# Altium PCB usb cuter.PcbDoc
Units mm, origin at the board's own origin, x right, y up, seen from the top; angles counter-clockwise.
Board outline 151 x 86.38 mm, 2 copper layers (Top Layer, Bottom Layer); 5 components, 5 nets, 36 pads, 0 vias.
Unrouted connection lines stored in the file: 6.
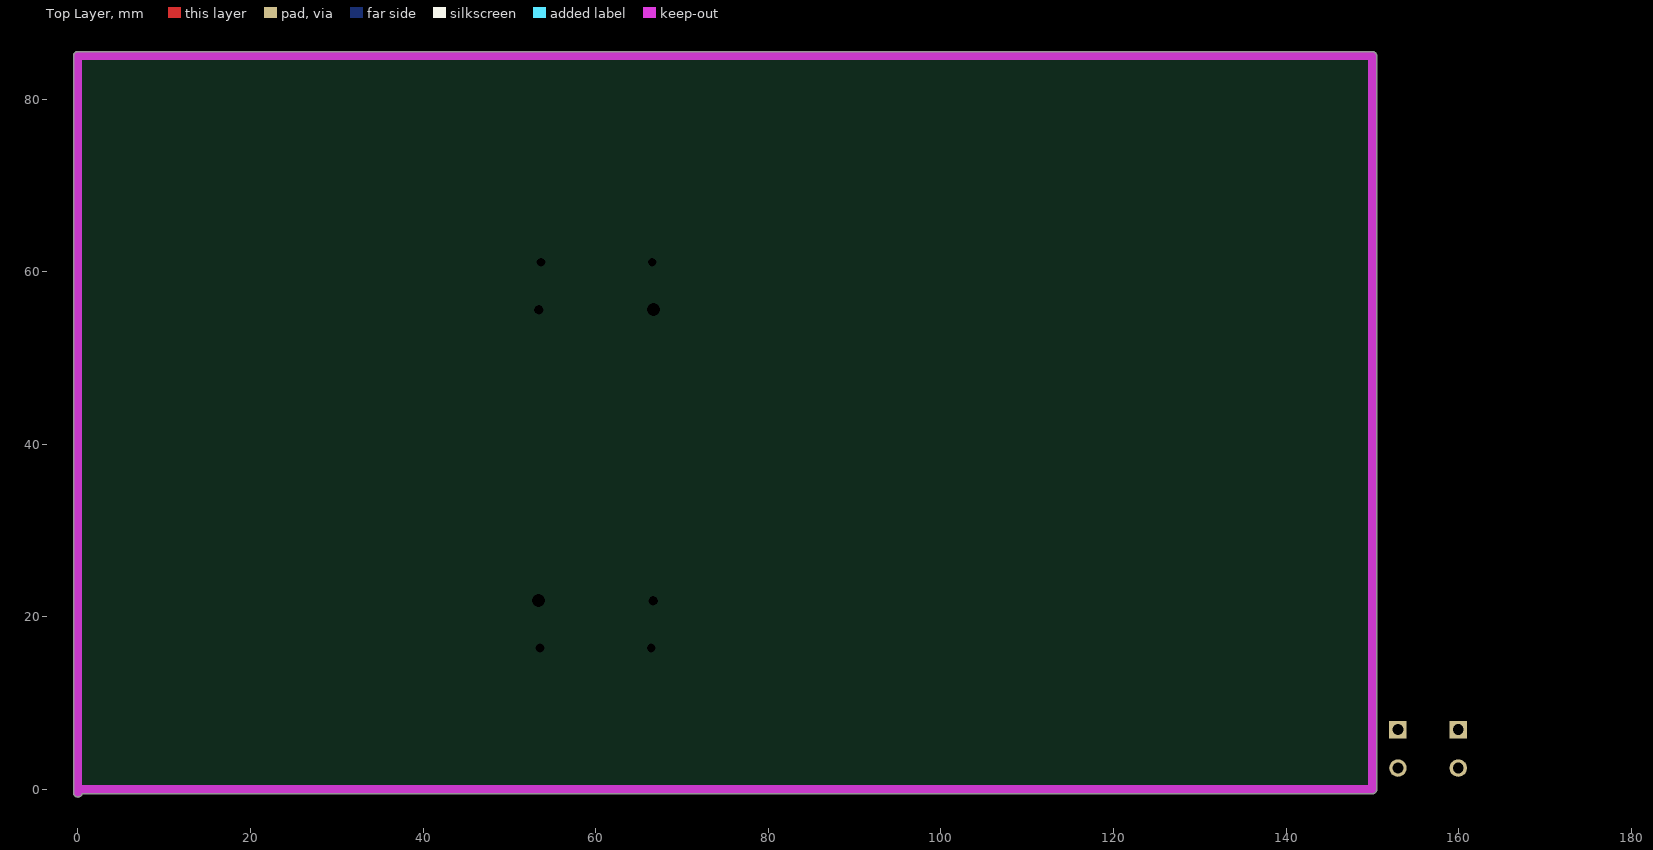
[diagram p0: Top Layer view]
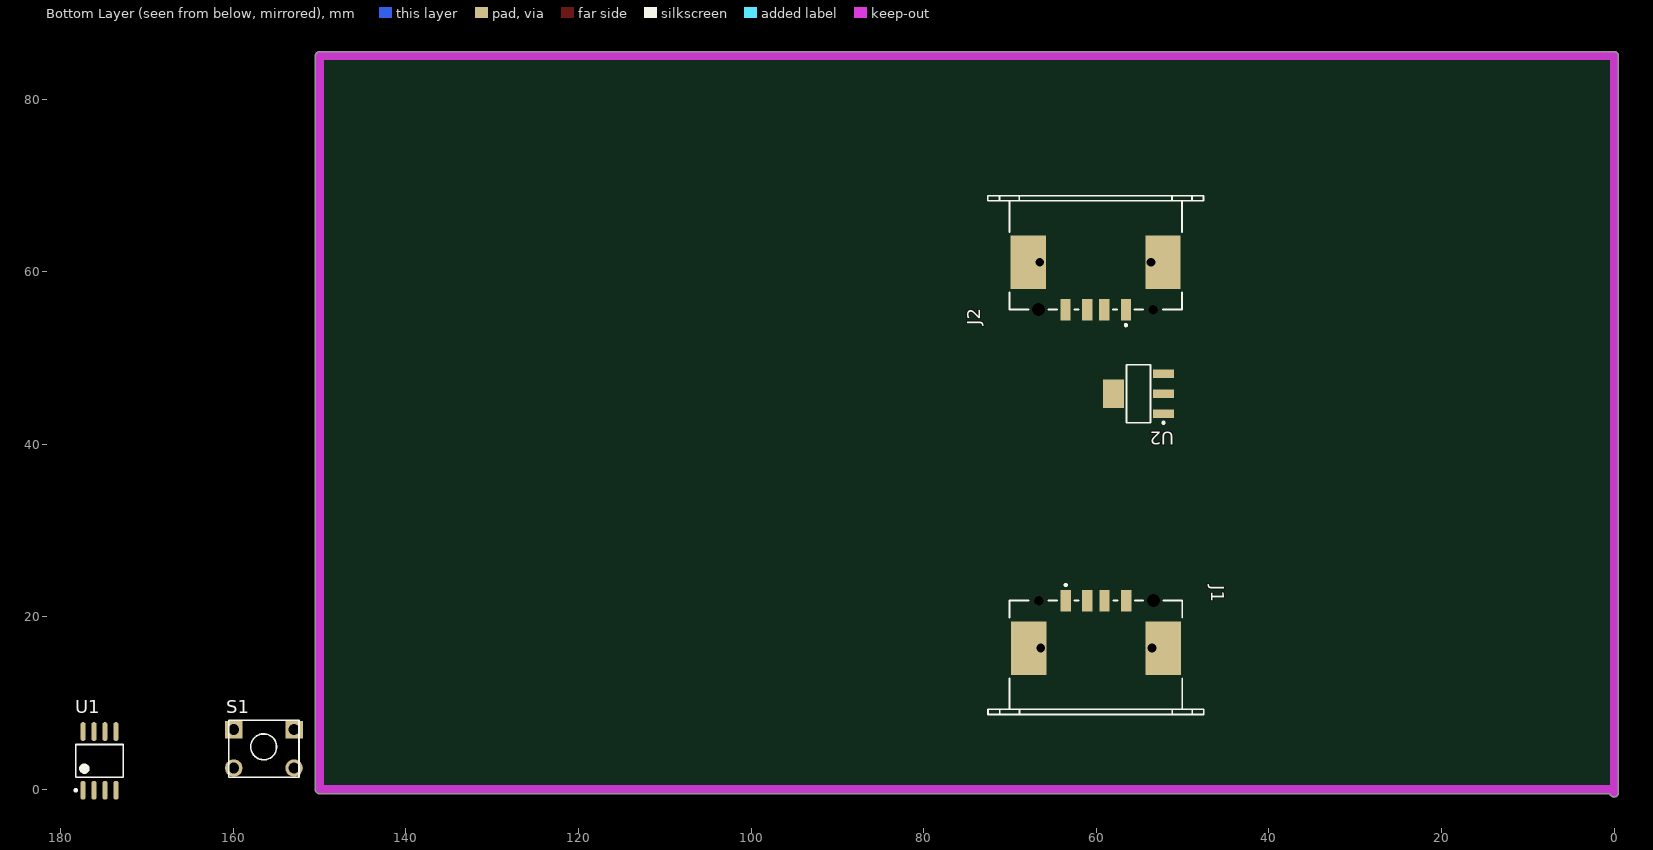
[diagram p1: Bottom Layer view, seen from below]

## Layer stack, top to bottom
Top Solder: solder mask 0.0102, Solder Resist, Dk 3.5
Top Layer: signal copper 0.0356
Dielectric 1: dielectric 0.32, FR-4, Dk 4.8
Bottom Layer: signal copper 0.0356
Bottom Solder: solder mask 0.0102, Solder Resist, Dk 3.5

## Board outline
-0.5,-0.381 -0.5,85 cw(c0,85) 0,85.5 150,85.5 cw(c150,85) 150.5,85 150.5,0 cw(c150,0) 150,-0.5 0.486,-0.5 cw(c0,-0.381)

## Design rules (kind name [scope] priority, off if disabled: settings)
Clearance Clearance_1 [InPolygon] p1: gap=0.8 ignorepadtopadclearanceinfootprint=FALSE
Clearance [All] p2: gap=0.254 ignorepadtopadclearanceinfootprint=FALSE except(0: Arc-Hole Track-Hole SMDPad-Hole THPad-Hole Via-Hole Fill-Hole Poly-Hole Region-Hole Text-Hole)
DiffPairsRouting [All] p1: maxlimit=0.254 minlimit=0.8 mostfreqgap=0.254 toplayer_minwidth=0.381 toplayer_maxwidth=0.381 toplayer_prefwidth=0.381 bottomlayer_minwidth=0.381 bottomlayer_maxwidth=0.381 bottomlayer_prefwidth=0.381 maxuncoupledlength=12.7
PolygonConnect [All] p1: connectstyle=Relief reliefconductorwidth=0.254 reliefentries=4 polygonreliefangle="90 Angle" airgapwidth=0.254
RoomDefinition shahbazi5v [InComponentClass('shahbazi5v')] p1: confinementstyle=ConfineIn formatcopy=TRUE lockcomponents=FALSE outline 144.907,-4.953 247.904,-4.953 247.904,23.114 144.907,23.114
RoutingLayers [All] p1: top layer_v5=FALSE bottom layer_v5=TRUE
RoutingVias [All] p1: holewidth=0.711 width=2.5 viastyle="Through Hole" minholewidth=0.711 minwidth=1.27 maxholewidth=0.711 maxwidth=2
SolderMaskExpansion [All] p1: expansion=0.102
Width [All] p1: maxlimit=3 minlimit=0.5 preferedwidth=1
28 further rules are at their usual default settings.

## Components (designator, comment, footprint, x,y, rotation, side; value= is the part's Value field where it differs from the comment)
J1 "1-353576-1" 353576 60.052,9.283 r270 bottom
J2 "1-353576-1" 353576 60.071,68.199 r90 bottom
S1 "PUSH BUTTON DOUBLE" "PUSH BUTTON" 156.464,4.699 r180 bottom
U1 "ATtiny15L-1SI" 8S2_N 175.514,3.302 r90 bottom
U2 "LM1117MP-3.3" MP04A_N 55.118,45.847 r0 bottom

## Footprints (in the part's own frame and the unit in brackets; to place one, negate y for a bottom-side part, rotate by r counter-clockwise, add the part's x,y. Pads: shape width x height; smd on the part's side, far side on the other; paste and mask are expansions set on the pad)
8S2_N [mm] "SOP, 8-Leads, Body 5.3x5.3mm, Pitch 1.27mm, IPC Medium Density"
  oval 2.2x0.6 smd: 1(-3.4,1.905) 2(-3.4,0.635) 3(-3.4,-0.635) 4(-3.4,-1.905) 5(3.4,-1.905) 6(3.4,-0.635) 7(3.4,0.635) 8(3.4,1.905)
  silkscreen extent -3.52,-2.75 1.9,2.88, body extent -2.73,-2.75 2.73,2.75, height 2.16
353576 [mm] "Connector; USB1.1, Type A, SM; 4 Position; Right Angle"
  rect 2.5x1.2 smd: 1(-12.6,-3.5) 2(-12.6,-1) 3(-12.6,1) 4(-12.6,3.5)
  rect 6.2x4.1 smd: 5(-7.1,7.8) 6(-7.1,-7.8)
  round 0.7 hole 1 unplated: MH1(-7.1,6.496) MH2(-7.1,-6.404)
  round 1.2 hole 1.5 unplated: MH3(-12.6,6.65)
  round 0.8 hole 1.1 unplated: MH4(-12.6,-6.65)
  silkscreen extent -14.52,-12.5 0.6,12.5
MP04A_N [mm] "SOT223, 4-Leads, Body 6.5x3.5mm, Pitch 2.3mm, Lead Span 7mm, IPC Medium Density"
  rect 2.4x1 smd: 1(-2.9,2.3) 2(-2.9,0) 3(-2.9,-2.3)
  rect 2.4x3.3 smd: 4(2.9,0)
  silkscreen extent -3.02,-3.35 1.4,3.47, body extent -1.85,-3.35 1.85,3.35, height 1.8
"PUSH BUTTON" [mil]
  rect 80x80 hole 50: 1(-137.5,87.5) 2(137.5,87.5)
  round 80 hole 50: 3(-137.5,-87.5) 4(137.5,-87.5)
  silkscreen extent -160,-130 160,130, body extent -155,-121 157,123, height 205

## Part data
J1 J2: "USB 1.1, Right Angle, SMT, A Type, Receptacle, 4 Position, White", PackageDocument=11-Apr-2003, ComponentLink1Description="Manufacturer Link", ComponentLink1URL=http://www.tycoelectronics.com/, ComponentLink2Description="Packaging Specification", ComponentLink2URL=http://ecommas.tycoelectronics.com/commerce/DocumentDelivery/DDEController?Action=showdoc&DocId=Customer+Drawing%7F353576%7FD%7Ftif%7FJapanese%7FJPN_CD_353576_D.tif, ContactMaterial="Copper Alloy", ContactPlating="Gold over Palladium Nickel", DatasheetDocument=11-Apr-2003, DrillSize="Corresponds to nominal value.", HousingMaterial=Thermoplastic, PackageReference=353576, PanelGround=Without, PCB_Layout="Complies with manufacturer's recommendation.", Published=15-Jul-2004, Publisher="Altium Limited"
S1: "Switch"
U1: "8-Bit AVR Microcontroller with 1K Byte of Flash Memory", Supplier Part Number 1=ATTINY15L-1SI-ND, ComponentLink1Description=Datasheet, ComponentLink1URL=http://www.atmel.com/dyn/resources/prod_documents/doc1187.pdf, ComponentLink2Description="Atmel.com Home", ComponentLink2URL=http://www.atmel.com, DatasheetVersion=1187E-AVR-06/02, LatestRevisionDate=16-Oct-2006, LatestRevisionNote="IPC-7351 Footprint Added.", PackageDescription="8-Lead, 0.208\" Body, Plastic Small Outline Package (EIAJ)", PackageReference=8S2, PackageVersion="revF, Apr-2008", Published=17-Sep-2003, Publisher="Altium Limited", Supplier 1=Digi-Key, Supplier 2=Farnell, Supplier 3=Mouser, Supplier Part Number 2=3618018, Supplier Part Number 3=556-ATTINY15L1SI
U2: "800mA Low-Dropout Linear Regulator", DigiKeyPartNumber=LM1117MP-3.3CT-ND, Manufacturer="National Semiconductor", PackageTopMarking=XYTT*N05A, PowerWise=N, Code_IPC=SOT223-4, Code_JEDEC=TO-261-AA, ComponentLink1Description="LM1117 Datasheet", ComponentLink1URL=http://www.national.com/ds/LM/LM1117.pdf, ComponentLink2Description="LM1117 Web Page", ComponentLink2URL=http://www.national.com/pf/LM/LM1117.html, ComponentLink3Description="MP04A Package Page", ComponentLink3URL=http://www.national.com/packaging/folders/mp04a.html, CompType="LDO IC", DatasheetVersion=Apr-2006, PackageDescription="Molded SOT-223, 6.50 x 3.56 x 1.6mm Body, 4 Lead, 2.3mm Pitch", PackageReference=MP04A, PackageVersion="revB, Apr-2003", PartNumber=LM1117MP-3.3, PinCount=4, Published=4-Dec-2008, Publisher="Altium Limited", RoHS=O

## Nets (pads, with @x,y where several pads share a name; then routed paths per layer and width w, separated by ;. In a path a pad name is that pad's centre, name@x,y a point inside that pad or via, vN(x,y) a via of type N, cw(c..) or ccw(c..) an arc to the next point about the centre after c; other vN are vias at no path point)
GND: J1.1 J2.4 U2.1
NetJ1_2: J1.2 J2.3
NetJ1_3: J1.3 J2.2
VCC: J2.1 U2.3
vout: J1.4 U2.2
pads on no net: J1.5 J1.6 J1.MH1 J1.MH2 J1.MH3 J1.MH4 J2.5 J2.6 J2.MH1 J2.MH2 J2.MH3 J2.MH4 S1.1 S1.2 S1.3 S1.4 U1.1 U1.2 U1.3 U1.4 U1.5 U1.6 U1.7 U1.8 U2.4

## Keep-outs
Keep-Out Layer:
  lines w1: 0,-0.381 0,85 150,85 150,0 0,0